# Altium PCB CT310高端控制盒左摇杆电路V1.0.PcbDoc
Units mil, origin at the board's own origin, x right, y up, seen from the top; angles counter-clockwise.
Board outline 1470 x 1470 mil, 2 copper layers (Top Layer, Bottom Layer), stack 65.792 mil thick; 2 components, 4 nets, 16 pads, 6 vias.
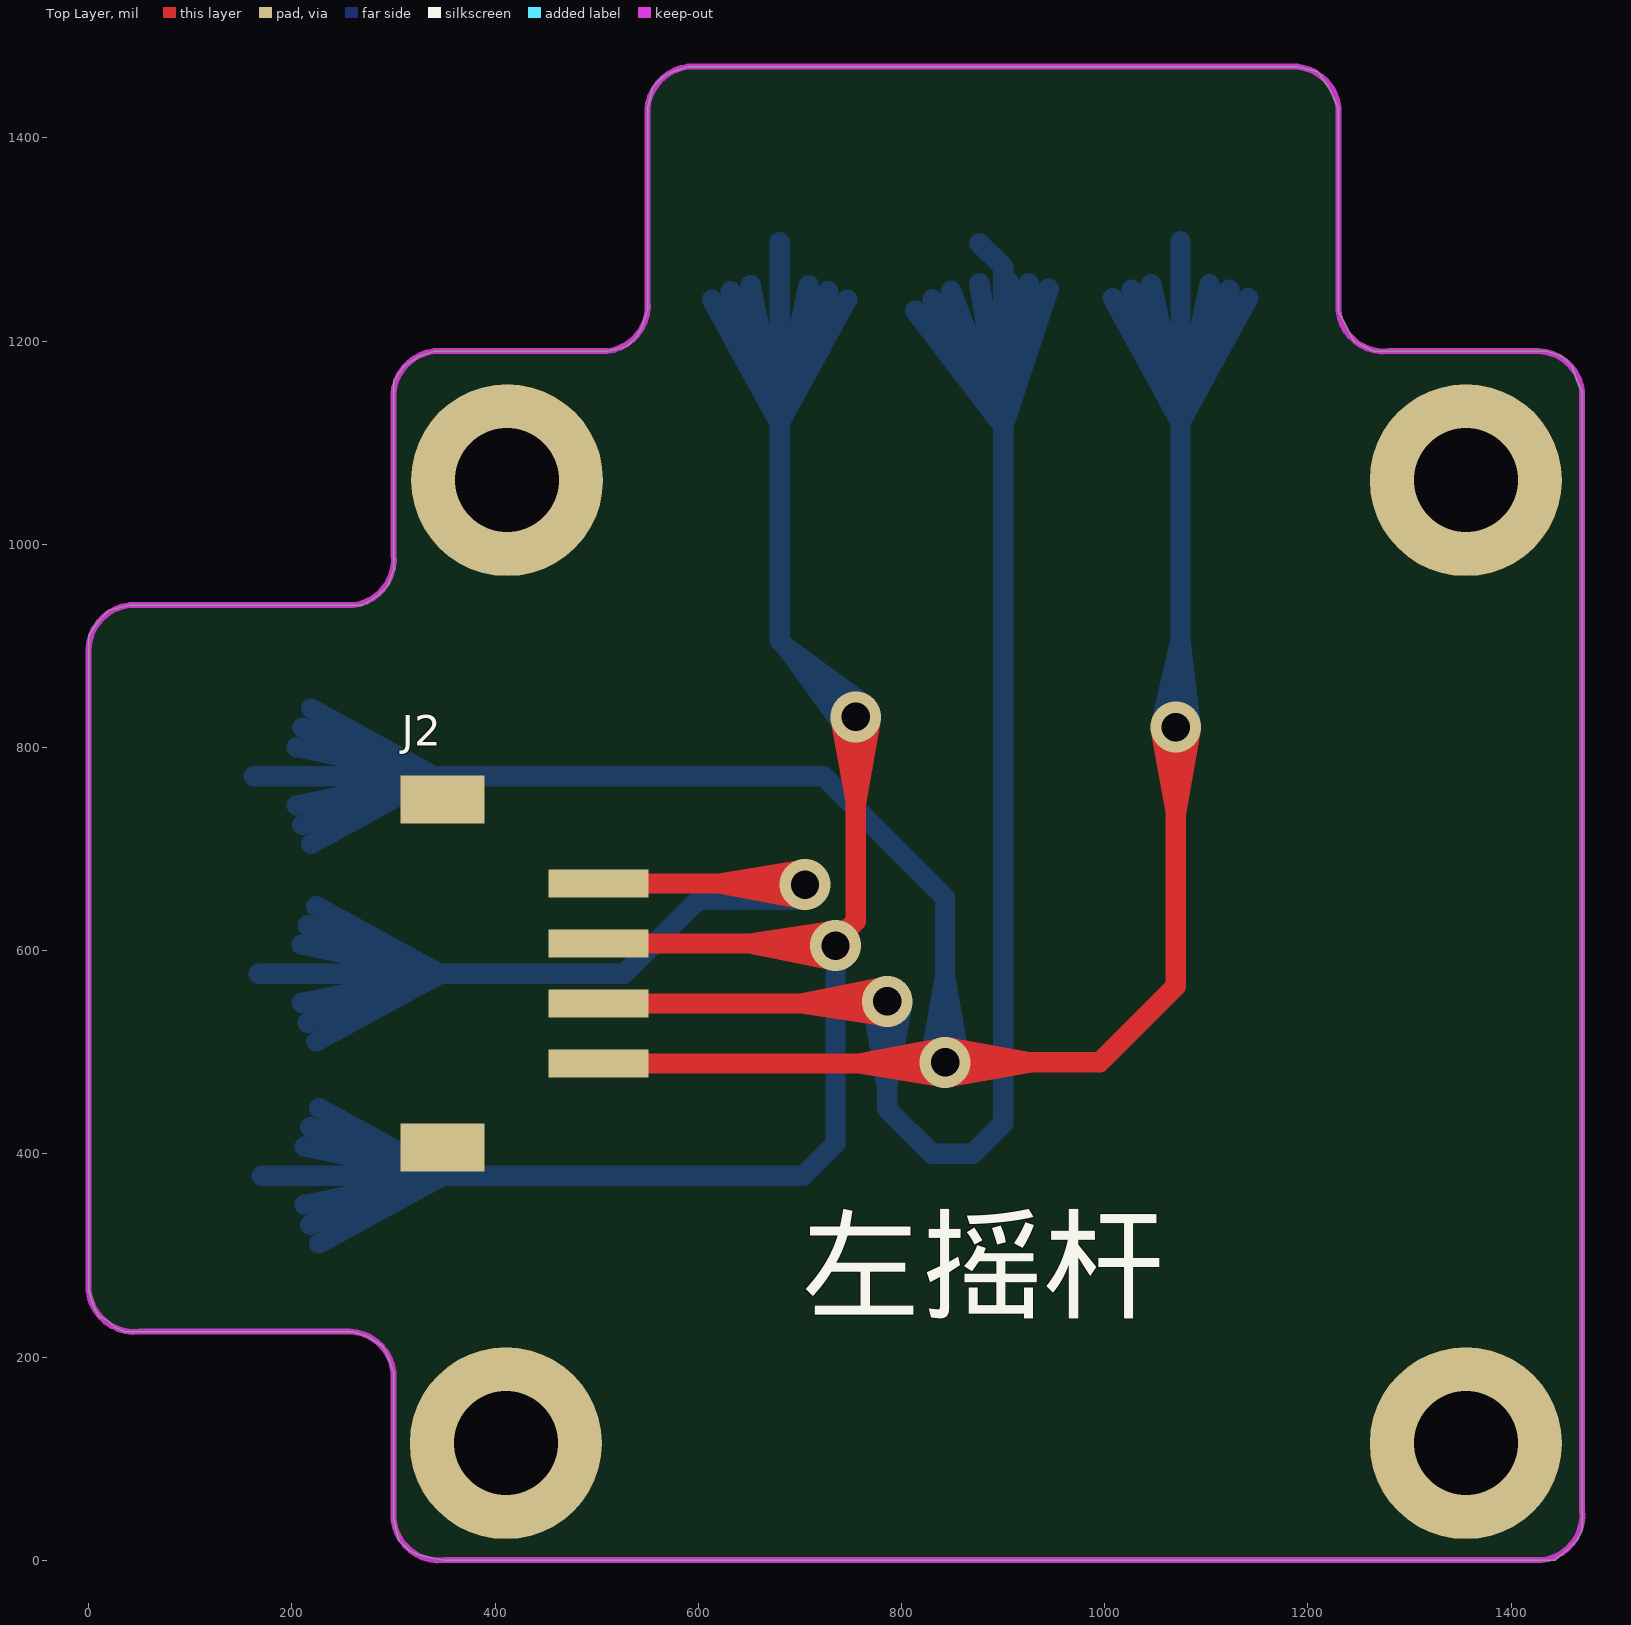
[diagram p0: Top Layer view]
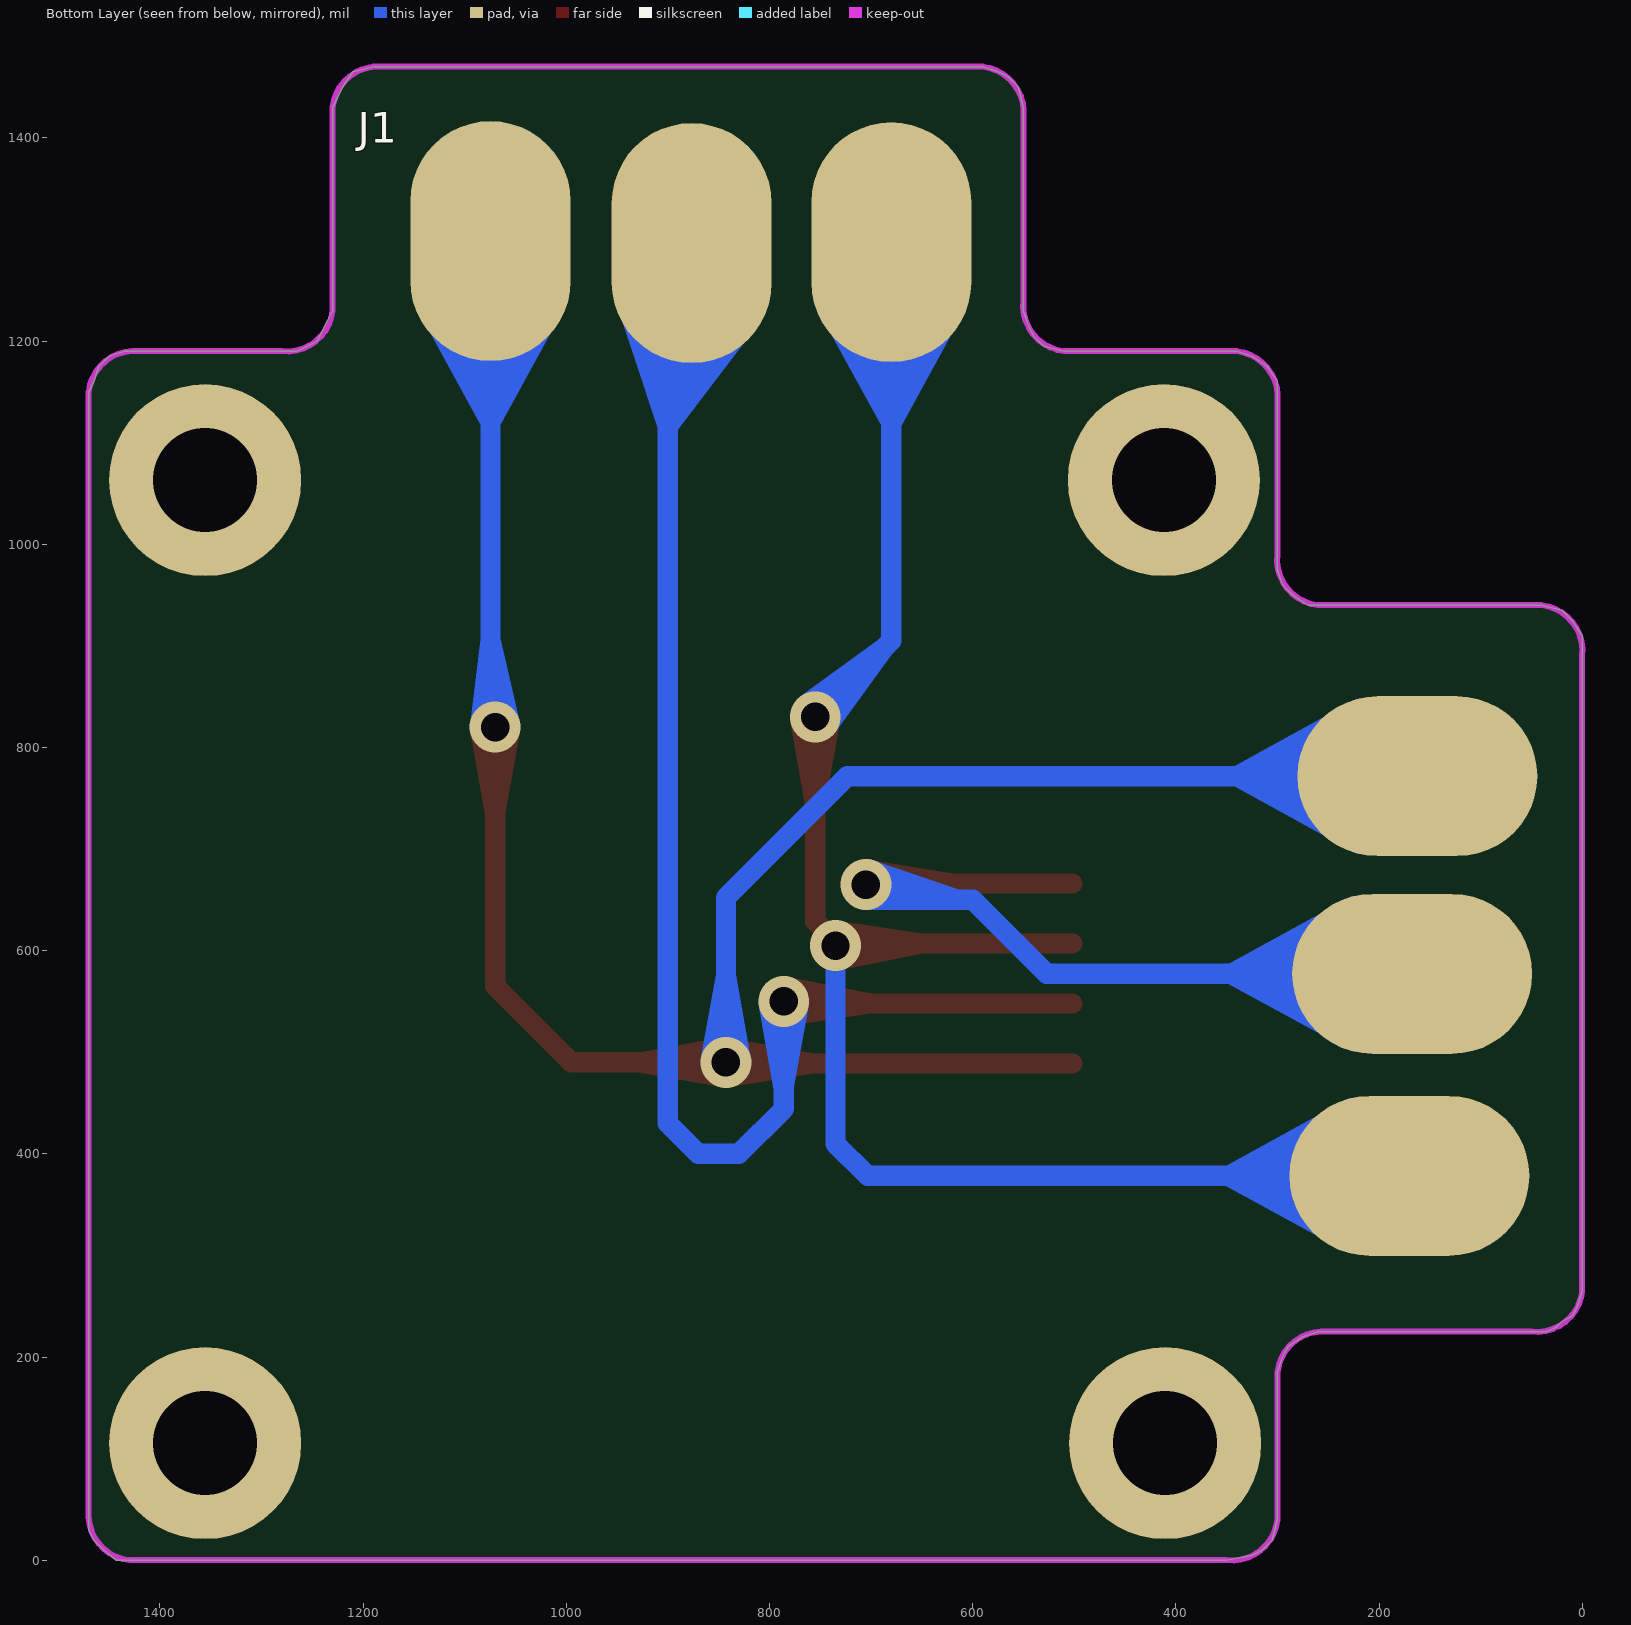
[diagram p1: Bottom Layer view, seen from below]

## Layer stack, top to bottom
Top Layer: signal copper 1.4
Dielectric: core 62.9921, FR-4, Dk 4.8
Bottom Layer: signal copper 1.4

## Board outline
0,890 0,265 5,250 10,240 20,235 25,230 35,225 50,225 250,225 260,225 275,220 290,210 295,200 300,185 300,170 300,40 305,20 315,10 325,5 350,0 425,0 1430,0 1442.95,0 1455,10 1465,20 1470,30 1470,1137.05 1470,1150 1465,1160 1460,1175 1450,1185 1435,1190 1420,1190 1280,1190 1265,1190 1255,1195 1245,1200 1240,1210 1235,1220 1230,1230 1230,1425 1230,1430 1225,1440 1220,1450 1210,1465 1190,1470 590,1470 575,1465 565,1460 555,1450 550,1430 550,1410 550,1230 545,1215 540,1205 530,1195 510,1190 340,1190 325,1185 310,1175 300,1160 300,1140 300,990 300,975 295,960 285,950 270,940 260,940 40,940 20,935 10,925 0,910 0,885

## Design rules (kind name [scope] priority, off if disabled: settings)
Clearance [All] p1: gap=10
PolygonConnect [All] p1: connectstyle=Relief reliefconductorwidth=10 reliefentries=4 polygonreliefangle="90 Angle" airgapwidth=10
RoutingVias [All] p1: holewidth=28 width=50 viastyle="Through Hole" minholewidth=28 minwidth=50 maxholewidth=28 maxwidth=50
SilkToSolderMaskClearance SilkscreenOverComponentPads [IsPad] p1: minsilkscreentomaskgap=10 clearancetoexposedcopper=TRUE
SolderMaskExpansion [All] p1: expansion=4
Width [All] p1: maxlimit=100 minlimit=10 preferedwidth=10 minimp=50.000000 maximp=50.000000 favimp=50.000000
27 further rules are at their usual default settings.

## Components (designator, comment, footprint, x,y, rotation, side; value= is the part's Value field where it differs from the comment)
J1 "HEADER1X6" H20JH 758.88,706.79 r90 top
J2 "HEADER1X4" ZH1X4WT-1.5 425,577.5 r90 top

## Footprints (in the part's own frame and the unit in brackets; to place one, negate y for a bottom-side part, rotate by r counter-clockwise, add the part's x,y. Pads: shape width x height; smd on the part's side, far side on the other; paste and mask are expansions set on the pad)
H20JH [mm]
  round 4.8 hole 2.6: 0(-15.028,-15.152) 0(-15.027,8.848) 0(9.05,-15.153) 0(9.05,8.818)
  oval 6x4 smd far side: 1(15.028,-8.017) 2(14.978,-2.987) 3(14.998,2.003)
  oval 4x6 smd far side: 4(1.648,15.153) 5(-3.292,15.023) 6(-8.342,14.953)
  body extent -18.03,-18.14 22.47,22.36, height 3.7
ZH1X4WT-1.5 [mm]
  rect 1.2x2.1 smd: 0(-4.35,1.95) 0(4.35,1.95)
  rect 0.7x2.5 smd: 1(-2.25,-1.95) 2(-0.75,-1.95) 3(0.75,-1.95) 4(2.25,-1.95)

## Via types
v1: diameter 50, hole 28, Top Layer to Bottom Layer, tented both sides, 6 vias

## Nets (pads, with @x,y where several pads share a name; then routed paths per layer and width w, separated by ;. In a path a pad name is that pad's centre, name@x,y a point inside that pad or via, vN(x,y) a via of type N, cw(c..) or ccw(c..) an arc to the next point about the centre after c; other vN are vias at no path point)
AX: J1.2 J2.2 | length 2915.8
  Top Layer w20: J2.2 787.97,547.97 v1(785.94,550) ; J2.2@537.2,547.97 610.98,547.97 ; v1@784.27,564.91 700.88,547.97 ; v1@784.98,535.03 700.88,547.97 ; v1@785,550 v1(785.94,550) ; 700.88,547.97 v1(785.94,550)
  Bottom Layer w20: v1@771,548.68 785.94,465 v1@800.89,548.68 ; v1(785.94,550) 785.94,444.05 830,400 870,400 900,430 900,1272.95 J1.2 ; J1.2@813.41,1229.79 900,1116.19 ; J1.2@830.49,1240.98 900,1116.19 ; J1.2@848.77,1249.53 900,1116.19 ; J1.2@876.5,1257.09 900,1116.19 ; J1.2@905.18,1258.94 900,1116.19 ; J1.2@925.24,1256.79 900,1116.19 ; J1.2@945.03,1251.75 900,1116.19
AY: J1.5 J2.4 | length 2351.9
  Top Layer w20: J2.4 703.92,666.08 v1(705,665) 619.98,666.08 ; J2.4@537.2,666.08 610.98,666.08 ; v1@703.49,650.08 619.98,666.08 ; v1@703.87,679.96 619.98,666.08
  Bottom Layer w20: J1.5 527.16,577.16 600,650 690,650 v1(705,665) 614.81,650 ; J1.5@206.81,577.16 345.55,577.16 ; J1.5@209.79,548.58 345.55,577.16 ; J1.5@209.79,605.75 345.55,577.16 ; J1.5@215.37,529.18 345.55,577.16 ; J1.5@215.37,625.15 345.55,577.16 ; J1.5@223.84,510.57 345.55,577.16 ; J1.5@223.84,643.76 345.55,577.16 ; v1@701.33,679.55 614.81,650 ; v1@706.24,650.05 614.81,650
GND: J1.3 J1.6 J2.3 | length 4366.6
  Top Layer w20: J2.3 732.97,607.03 755,629.06 v1(755,830) ; J2.3@537.2,607.03 610.98,607.03 ; v1@733.32,590.09 649.93,607.03 ; v1@734.03,619.97 649.93,607.03 ; v1(735,605) 649.93,607.03 ; v1@740.06,828.68 755,745 v1@769.94,828.68
  Bottom Layer w20: J1.6 703.35,378.35 735,410 v1(735,605) ; J1.6@209.57,378.35 348.31,378.35 ; J1.6@212.54,349.76 348.31,378.35 ; J1.6@212.54,406.93 348.31,378.35 ; J1.6@218.13,330.36 348.31,378.35 ; J1.6@218.13,426.33 348.31,378.35 ; J1.6@226.6,311.75 348.31,378.35 ; J1.6@226.6,444.94 348.31,378.35 ; J1.3@613.44,1240.84 680.04,1119.13 ; J1.3@632.06,1249.31 680.04,1119.13 ; J1.3@651.45,1254.9 680.04,1119.13 ; J1.3@680.04,1257.87 680.04,1119.13 ; J1.3 680.04,904.96 v1(755,830) ; J1.3@708.63,1254.9 680.04,1119.13 ; J1.3@728.02,1249.31 680.04,1119.13 ; v1@743.59,820.26 687.57,897.43 v1@764.74,841.41 ; J1.3@746.64,1240.84 680.04,1119.13
VCC: J1.1 J1.4 J2.1 | length 5267.3
  Top Layer w20: J2.1 843.92,488.92 v1(842.83,490) ; J2.1@537.2,488.92 610.98,488.92 ; v1@841.32,504.92 757.82,488.92 ; v1@841.7,475.04 757.82,488.92 ; v1@844.16,475.06 927.83,490 v1@844.16,504.94 ; v1@1055.06,818.68 1070,735 v1@1084.94,818.68 ; v1(1070,820) 1070,565 995,490 v1(842.83,490) ; 757.82,488.92 v1(842.83,490)
  Bottom Layer w20: J1.4 723.35,771.65 842.83,652.17 v1(842.83,490) ; J1.4@201.69,771.65 340.43,771.65 ; J1.4@204.67,743.07 340.43,771.65 ; J1.4@204.67,800.24 340.43,771.65 ; J1.4@210.25,723.67 340.43,771.65 ; J1.4@210.25,819.64 340.43,771.65 ; J1.4@218.72,705.06 340.43,771.65 ; J1.4@218.72,838.25 340.43,771.65 ; v1@827.89,491.32 842.83,575 v1@857.78,491.32 ; J1.1@1007.93,1242.03 1074.53,1120.31 ; J1.1@1026.55,1250.49 1074.53,1120.31 ; J1.1@1045.94,1256.08 1074.53,1120.31 ; v1@1055.15,822.1 1074.53,905.44 ; J1.1@1074.53,1259.05 1074.53,1120.31 ; J1.1 1074.53,824.53 v1(1070,820) 1074.53,905.44 ; v1@1084.99,820.52 1074.53,905.44 ; J1.1@1103.11,1256.08 1074.53,1120.31 ; J1.1@1122.51,1250.49 1074.53,1120.31 ; J1.1@1141.13,1242.03 1074.53,1120.31
pads on no net: J1.0 J2.0

## Keep-outs
Keep-Out Layer:
  lines w5.91: 550,1230 550,1430 ; 550,1240 cw(c505,1235) 510,1190 340,1190 ccw(c345,1145) 300,1140 300,990 cw(c255,985) 260,940 40,940 ccw(c45,895) 0,890 0,265 ccw(c45,270) 50,225 250,225 cw(c255,180) 300,185 300,40 ccw(c345,45) 350,0 1430,0 ccw(c1425,45) 1470,50 1470,1150 ccw(c1425,1145) 1420,1190 1280,1190 cw(c1275,1235) 1230,1230 1230,1430 ccw(c1185,1425) 1180,1470 ; 550,1420 cw(c595,1425) 590,1470 1190,1470

## Silkscreen, mask and mechanical layers (free items; w line width, h text height)
Top Overlay:
  text "左摇杆" at 700,220 h150

## Dimensions
1470,50 to 0,265 on Keep-Out Layer
1430,0 to 1190,1470 on Keep-Out Layer